# Altium PCB pulsegen-v2-released.PcbDoc
Units mm, origin at the board's own origin, x right, y up, seen from the top; angles counter-clockwise.
Board outline 66.14 x 42.58 mm, 2 copper layers (Top Layer, Bottom Layer), stack 1.646 mm thick; 26 components, 13 nets, 68 pads, 168 vias.
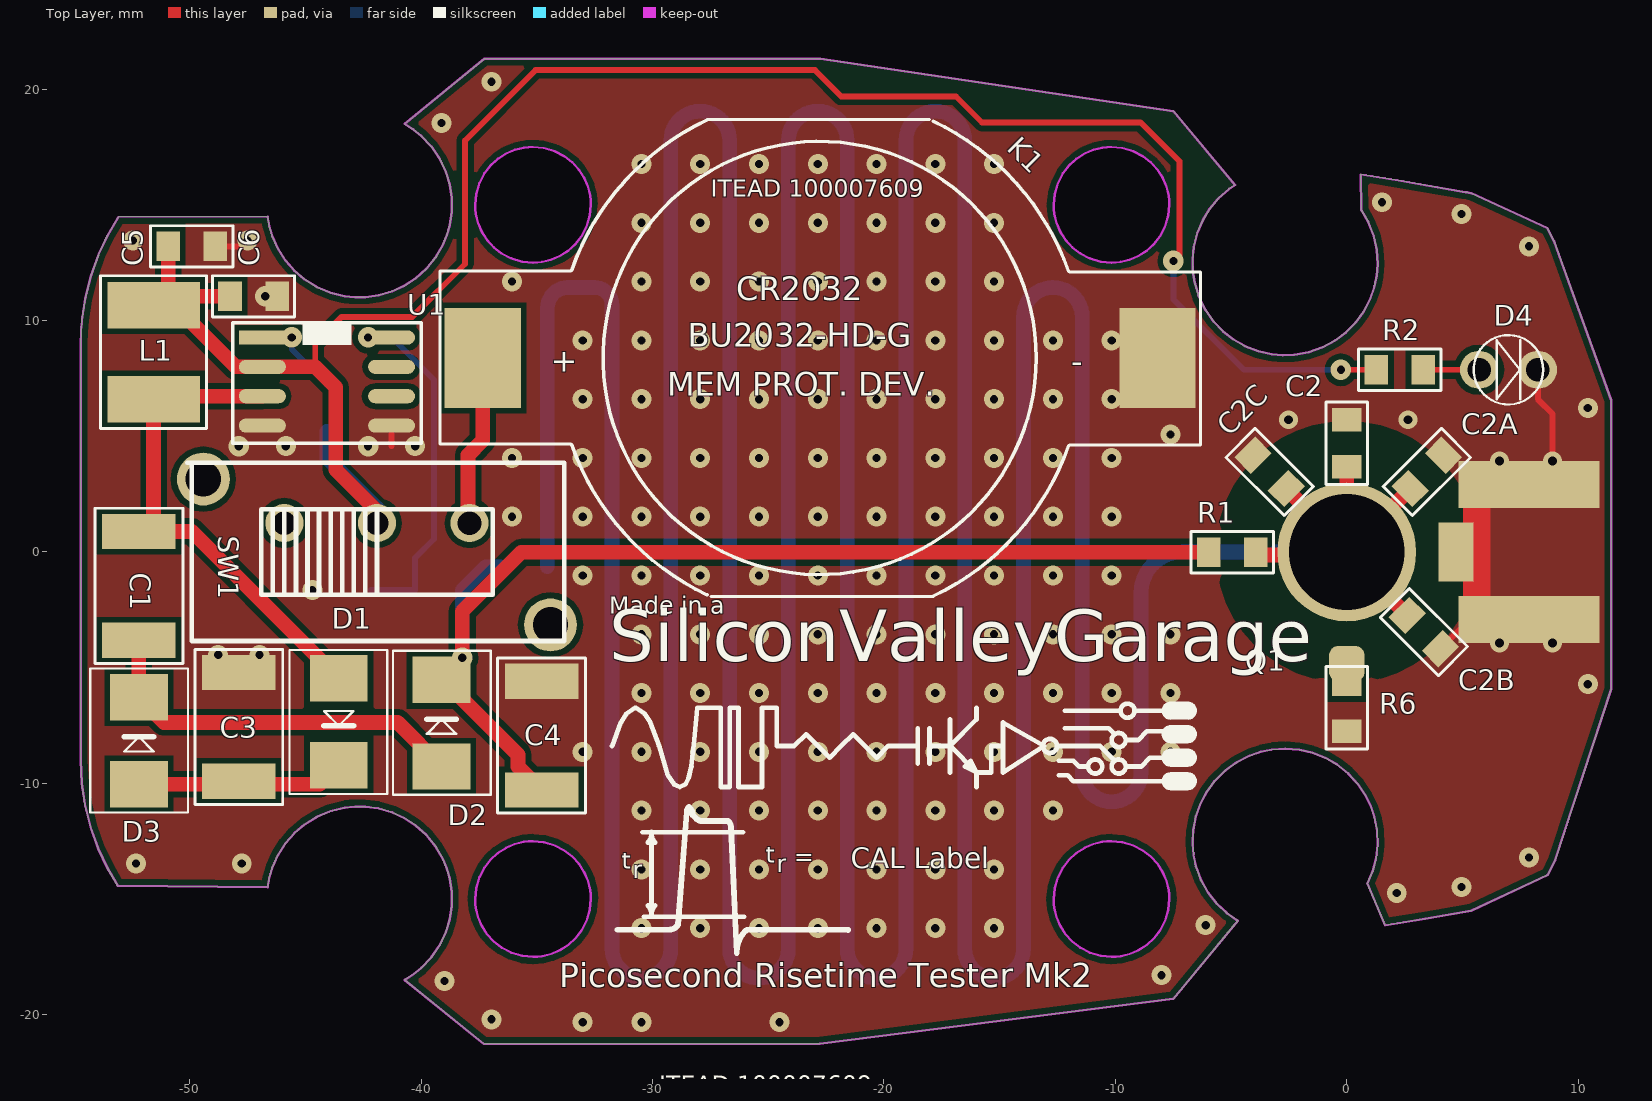
[diagram p0: Top Layer view]
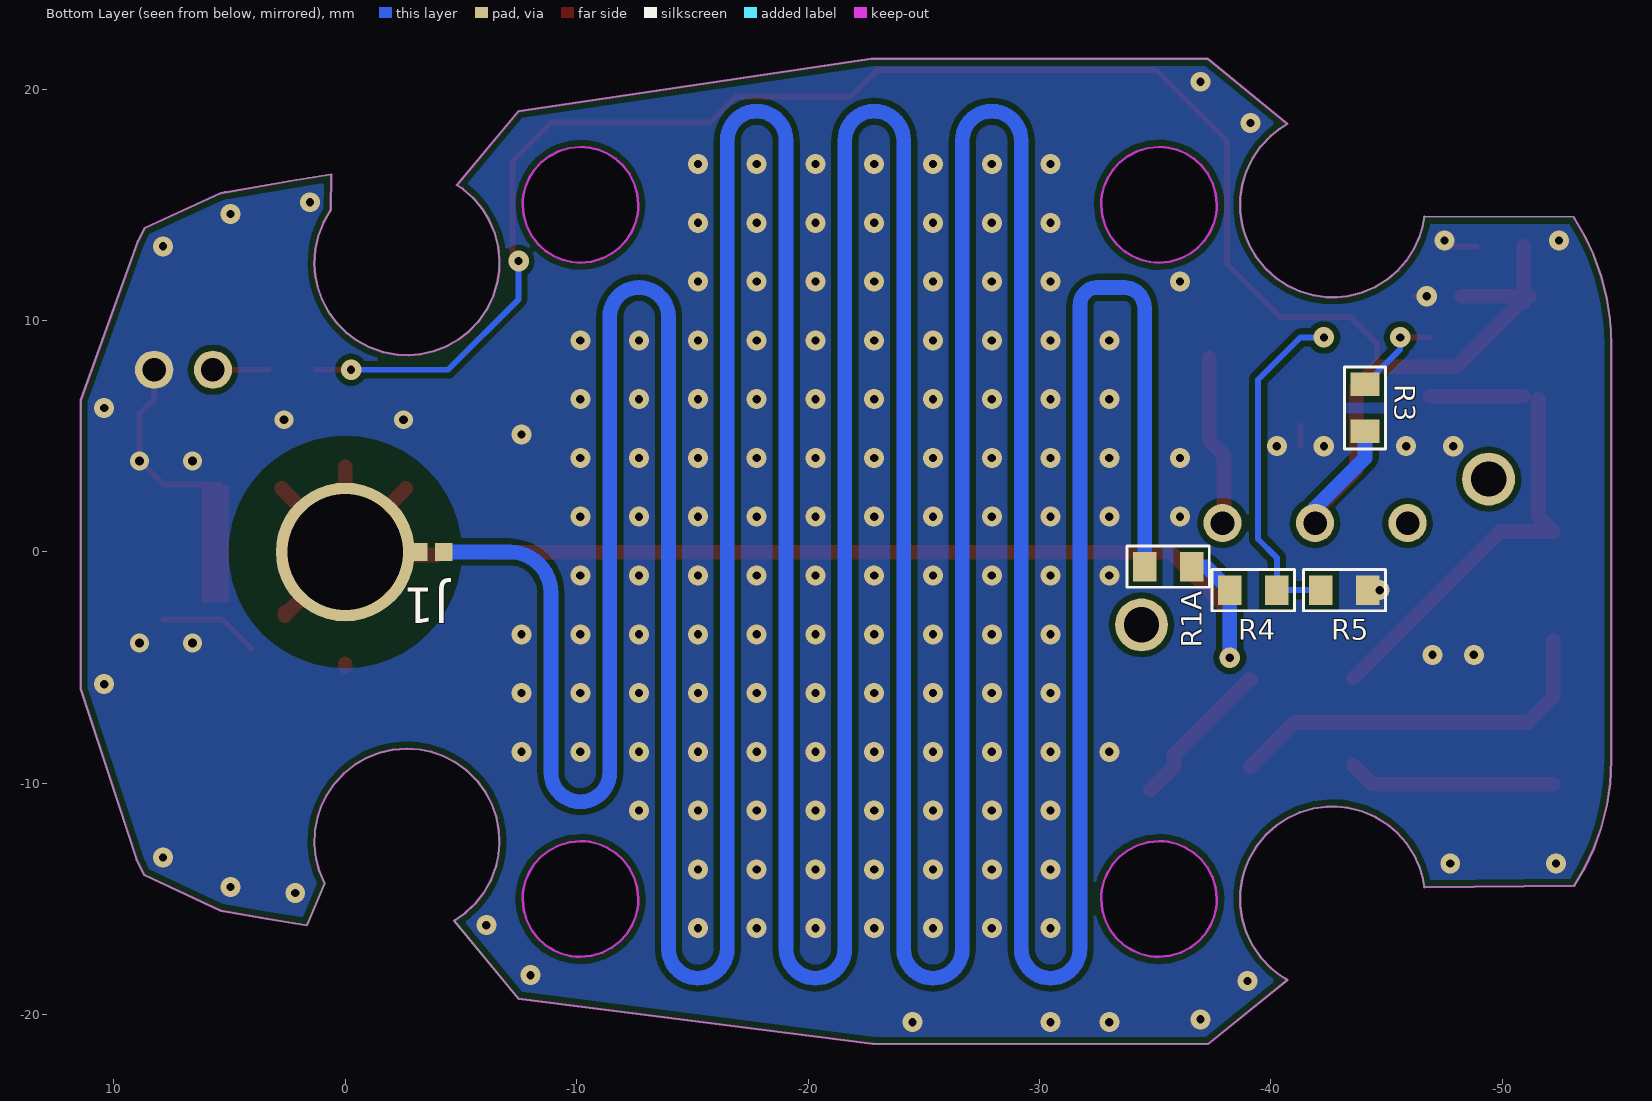
[diagram p1: Bottom Layer view, seen from below]

## Layer stack, top to bottom
Top Layer: signal copper 0.0356
Dielectric: core 1.5748, FR-4, Dk 4.8
Bottom Layer: signal copper 0.0356

## Board outline
-40.716,-18.489 -40.348,-18.255 -39.996,-17.974 -39.563,-17.519 -39.204,-16.998 -38.93,-16.422 -38.764,-15.871 -38.679,-15.297 -38.679,-14.689 -38.767,-14.109 -38.887,-13.69 -39.058,-13.273 -39.372,-12.729 -39.771,-12.238 -40.246,-11.813 -40.729,-11.498 -41.255,-11.255 -41.839,-11.084 -42.42,-11.004 -42.856,-11.001 -43.303,-11.048 -43.915,-11.196 -44.498,-11.44 -45.04,-11.776 -45.478,-12.15 -45.86,-12.586 -46.188,-13.099 -46.428,-13.634 -46.554,-14.051 -46.636,-14.494 -53.107,-14.426 -53.564,-13.645 -53.949,-12.825 -54.287,-11.878 -54.528,-10.904 -54.66,-10.004 -54.711,-8.998 -54.711,9.005 -54.697,9.517 -54.657,10.029 -54.522,10.93 -54.278,11.911 -53.941,12.852 -53.556,13.667 -53.097,14.448 -53.075,14.478 -46.636,14.5 -46.554,14.058 -46.428,13.64 -46.188,13.105 -45.86,12.593 -45.478,12.157 -45.04,11.783 -44.498,11.447 -43.915,11.203 -43.304,11.054 -42.856,11.008 -42.42,11.011 -41.839,11.09 -41.255,11.261 -40.729,11.504 -40.246,11.819 -39.771,12.244 -39.373,12.735 -39.058,13.28 -38.887,13.696 -38.767,14.115 -38.679,14.695 -38.679,15.304 -38.764,15.877 -38.93,16.429 -39.204,17.004 -39.563,17.525 -39.996,17.981 -40.347,18.262 -40.716,18.495 -37.262,21.316 -22.741,21.31 -7.493,19.05 -4.826,15.856 -5.085,15.69 -5.559,15.267 -5.925,14.824 -6.226,14.33 -6.453,13.795 -6.606,13.2 -6.666,12.614 -6.65,12.134 -6.573,11.641 -6.39,11.041 -6.114,10.473 -5.749,9.953 -5.352,9.538 -4.896,9.182 -4.391,8.894 -3.817,8.672 -3.243,8.545 -2.764,8.504 -2.265,8.524 -1.648,8.635 -1.052,8.844 -0.493,9.146 -0.034,9.492 0.372,9.903 0.717,10.371 1.004,10.915 1.197,11.471 1.293,11.942 1.332,12.439 1.293,13.066 1.155,13.682 0.92,14.272 0.63,14.768 0.606,16.315 2.349,16.032 5.133,15.551 5.201,15.539 5.27,15.526 5.379,15.507 8.666,13.999 8.959,13.426 11.43,6.556 11.43,-5.916 9.002,-13.319 8.689,-13.953 5.379,-15.5 5.311,-15.512 5.243,-15.525 5.133,-15.544 3.395,-15.849 1.653,-16.14 0.892,-14.322 1.117,-13.792 1.264,-13.233 1.329,-12.656 1.307,-12.041 1.197,-11.463 1.045,-11.007 0.83,-10.556 0.484,-10.033 0.057,-9.568 -0.441,-9.174 -0.94,-8.889 -1.478,-8.678 -2.044,-8.546 -2.658,-8.497 -3.244,-8.539 -3.715,-8.636 -4.188,-8.797 -4.747,-9.08 -5.259,-9.45 -5.709,-9.899 -6.05,-10.361 -6.322,-10.871 -6.519,-11.418 -6.639,-12.022 -6.666,-12.609 -6.624,-13.088 -6.519,-13.576 -6.303,-14.165 -5.995,-14.716 -5.602,-15.215 -5.182,-15.608 -4.707,-15.938 -7.493,-19.304 -22.772,-21.248 -37.287,-21.26
cut-out: -10.167,-17.497 -9.973,-17.489 -9.774,-17.466 -9.387,-17.372 -9.006,-17.211 -8.648,-16.982 -8.331,-16.693 -8.068,-16.355 -7.853,-15.941 -7.711,-15.464 -7.667,-14.997 -7.675,-14.802 -7.699,-14.604 -7.792,-14.216 -7.954,-13.835 -8.182,-13.477 -8.471,-13.16 -8.81,-12.898 -9.223,-12.682 -9.7,-12.541 -10.167,-12.497 -10.362,-12.504 -10.561,-12.528 -10.948,-12.622 -11.329,-12.783 -11.687,-13.011 -12.004,-13.301 -12.266,-13.639 -12.482,-14.052 -12.623,-14.53 -12.667,-14.997 -12.66,-15.191 -12.636,-15.39 -12.543,-15.777 -12.381,-16.158 -12.153,-16.516 -11.863,-16.833 -11.525,-17.096 -11.112,-17.311 -10.635,-17.453
cut-out: -35.167,-17.497 -34.973,-17.489 -34.774,-17.466 -34.387,-17.372 -34.006,-17.211 -33.648,-16.982 -33.331,-16.693 -33.068,-16.355 -32.853,-15.941 -32.711,-15.464 -32.667,-14.997 -32.675,-14.802 -32.699,-14.604 -32.792,-14.216 -32.954,-13.835 -33.182,-13.477 -33.471,-13.16 -33.81,-12.898 -34.223,-12.682 -34.7,-12.541 -35.167,-12.497 -35.362,-12.504 -35.561,-12.528 -35.948,-12.622 -36.329,-12.783 -36.687,-13.011 -37.004,-13.301 -37.266,-13.639 -37.482,-14.052 -37.623,-14.53 -37.667,-14.997 -37.66,-15.191 -37.636,-15.39 -37.543,-15.777 -37.381,-16.158 -37.153,-16.516 -36.863,-16.833 -36.525,-17.096 -36.112,-17.311 -35.635,-17.453
cut-out: -35.167,12.503 -34.973,12.511 -34.774,12.534 -34.387,12.628 -34.006,12.789 -33.648,13.018 -33.331,13.307 -33.068,13.645 -32.853,14.059 -32.711,14.536 -32.667,15.003 -32.675,15.198 -32.699,15.396 -32.792,15.784 -32.954,16.165 -33.182,16.523 -33.471,16.84 -33.81,17.102 -34.223,17.318 -34.7,17.459 -35.167,17.503 -35.362,17.496 -35.561,17.472 -35.948,17.378 -36.329,17.217 -36.687,16.989 -37.004,16.699 -37.266,16.361 -37.482,15.948 -37.623,15.47 -37.667,15.003 -37.66,14.809 -37.636,14.61 -37.543,14.223 -37.381,13.842 -37.153,13.484 -36.863,13.167 -36.525,12.904 -36.112,12.689 -35.635,12.547
cut-out: -10.167,12.503 -9.973,12.511 -9.774,12.534 -9.387,12.628 -9.006,12.789 -8.648,13.018 -8.331,13.307 -8.068,13.645 -7.853,14.059 -7.711,14.536 -7.667,15.003 -7.675,15.198 -7.699,15.396 -7.792,15.784 -7.954,16.165 -8.182,16.523 -8.471,16.84 -8.81,17.102 -9.223,17.318 -9.7,17.459 -10.167,17.503 -10.362,17.496 -10.561,17.472 -10.948,17.378 -11.329,17.217 -11.687,16.989 -12.004,16.699 -12.266,16.361 -12.482,15.948 -12.623,15.47 -12.667,15.003 -12.66,14.809 -12.636,14.61 -12.543,14.223 -12.381,13.842 -12.153,13.484 -11.863,13.167 -11.525,12.904 -11.112,12.689 -10.635,12.547

## Design rules (kind name [scope] priority, off if disabled: settings)
AssemblyTestPointUsage [All] p1 off:
AssemblyTestpoint [All] p1 off: testpointundercomponent=TRUE minsize=1.016 maxsize=2.54 preferedsize=1.524 minholesize=0 maxholesize=1.016 preferedholesize=0.813 testpointgrid=0.025 usegrid=TRUE gridtolerance=0 allowsidetop=TRUE allowsidebottom=TRUE
Clearance Clearance_2 [All] p1: gap=0.254
Clearance Clearance_1 [InPolygon] p2: gap=0.203
Clearance waveguide [InNet('NetC1_1') vs InNet('GND')] p3: gap=0.203
ComponentClearance [All] p1 off: gap=0.254 collisioncheckmode=3 verticalgap=0.254 showdistances=FALSE
DiffPairsRouting [All] p1 off: maxlimit=0.254 minlimit=0.254 mostfreqgap=0.254 maxuncoupledlength=12.7
FabricationTestPointUsage [All] p1 off: valid=0 allowmultiple=FALSE
FabricationTestpoint [All] p1 off: side=3 testpointundercomponent=TRUE minsize=1.016 maxsize=2.54 preferedsize=1.524 minholesize=0 maxholesize=1.016 preferedholesize=0.813 testpointgrid=0.025 allowsidetop=TRUE allowsidebottom=TRUE usegrid=TRUE gridtolerance=0
FanoutControl Fanout_BGA [IsBGA] p1 off: bgadir=Out bgaviamode=Centered fanoutstyle=Auto fanoutdirection=Alternating viagrid=0.025 // Fanout_BGA (Default Rule)
FanoutControl Fanout_LCC [IsLCC] p2 off: bgadir=Out bgaviamode=Centered fanoutstyle=Auto fanoutdirection=Alternating viagrid=0.025 // Fanout_LCC (Default Rule)
FanoutControl Fanout_SOIC [IsSOIC] p3 off: bgadir=Out bgaviamode=Centered fanoutstyle=Auto fanoutdirection=Alternating viagrid=0.025 // Fanout_SOIC (Default Rule)
FanoutControl Fanout_Small [(CompPinCount < 5)] p4 off: bgadir=Out bgaviamode=Centered fanoutstyle=Auto fanoutdirection=OutThenIn viagrid=0.025 // Fanout_Small (Default Rule)
FanoutControl Fanout_Default [All] p5 off: bgadir=Out bgaviamode=Centered fanoutstyle=Auto fanoutdirection=Alternating viagrid=0.025 // Fanout_Default (Default Rule)
Height [All] p1 off: minheight=0 maxheight=25.4 prefheight=12.7
HoleSize [All] p1 off: absolutevalues=TRUE maxlimit=2.54 minlimit=0.025 maxpercent=80.000 minpercent=20.000
HoleToHoleClearance [All] p1 off: gap=0.254 allowstackedmicrovias=TRUE
LayerPairs [All] p1 off: enforce=TRUE
MinimumSolderMaskSliver [All] p1 off: minsoldermaskwidth=0.254
NetAntennae [All] p1 off: netantennaetolerance=0
PasteMaskExpansion [All] p1 off: expansion=0
PlaneClearance [All] p1 off: clearance=0.508
PlaneConnect [All] p1 off: planeconnectstyle=Relief reliefexpansion=0.508 reliefentries=4 reliefconductorwidth=0.254 reliefairgap=0.254
PolygonConnect [All] p1: connectstyle=Direct reliefconductorwidth=0.254 reliefentries=4 polygonreliefangle="90 Angle" airgapwidth=0.254
RoutingCorners [All] p1 off: cornerstyle=45-Degree minsetback=2.54 maxsetback=2.54
RoutingLayers [All] p1 off: top layer_v5=TRUE bottom layer_v5=TRUE
RoutingPriority [All] p1 off: routingpriority=0
RoutingTopology [All] p1 off: topology=Shortest
RoutingVias [All] p1: holewidth=0.356 width=0.889 viastyle="Through Hole" minholewidth=0.356 minwidth=0.889 maxholewidth=0.711 maxwidth=1.27
SilkToSilkClearance [All] p1 off: silktosilkclearance=0.254
SilkscreenOverComponentPads [All] p1 off: minsilkscreentomaskgap=0.254
SolderMaskExpansion [All] p1 off: expansion=0.102
Width [All] p1: maxlimit=2.54 minlimit=0.254 preferedwidth=0.254 minimp=50.000000 maximp=50.000000 favimp=50.000000
2 further rules are at their usual default settings.

## Components (designator, comment, footprint, x,y, rotation, side; value= is the part's Value field where it differs from the comment)
C1 "470nF" 1812C-GENERIC -52.197,0.889 r270 top
C2 "2pF" 0805C-GENERIC 0,3.937 r90 top
C2A "2pF" 0805C-GENERIC 2.921,2.921 r45 top
C2B "2pF" 0805C-GENERIC 2.794,-2.921 r315 top
C2C "2pF" 0805C-GENERIC -2.794,2.921 r135 top
C3 "470nF" 1812C-GENERIC -47.879,-5.207 r270 top
C4 "470nF" 1812C-GENERIC -34.798,-5.588 r270 top
C5 "10uF" 0805C-GENERIC -50.673,13.208 r0 top
C6 "10uF" 0805C-GENERIC -48.006,11.049 r0 top
D1 "MURS120" DIODE-SMB -43.561,-5.461 r90 top
D2 "MURS120" DIODE-SMB -39.116,-9.271 r270 top
D3 "MURS120" DIODE-SMB -52.197,-10.033 r270 top
D4 "LED-YELLOW-3MM" LED-3MM-YELLOW 5.715,7.874 r0 top
J1 "BYPASS" BYPASS -4.645,0 r0 bottom
K1 "3V-CR2023" BATCLIP-CR2032 -37.338,8.382 r0 top
L1 "150uH" TOKO-NR4018 -51.562,10.668 r270 top
Q1 "2N2369-JW" JW2N2369 1.778,-0.889 r0 top
R1 "10M" 0805R-TBD -5.709,-0.013 r0 top
R1A "10M" 0805R-TBD -36.322,-0.635 r0 bottom
R2 "220R" 0805R-220 1.524,7.874 r0 top
R3 "220R" 0805R-220 -44.069,5.461 r90 bottom
R4 "10M" 0805R-TBD -38.481,-1.651 r180 bottom
R5 "10K" 0805R-10K -42.164,-1.651 r180 bottom
R6 "10K" 0805R-10K 0,-5.715 r270 top
SW1 "SW-MHS122K" MHS122K -41.91,0 r180 top
U1 "LT1073" SO8 -46.863,9.271 r0 top

## Footprints (in the part's own frame and the unit in brackets; to place one, negate y for a bottom-side part, rotate by r counter-clockwise, add the part's x,y. Pads: shape width x height; smd on the part's side, far side on the other; paste and mask are expansions set on the pad)
0805C-GENERIC [mil] "CAPACITOR 0805"
  rect 40x50 smd: 1(-10,0) 2(70,0)
  silkscreen extent -40,-35 100,35, body extent -11,-25 70,25, height 26
0805R-10K [mil] "RESISTOR 0805"
  rect 40x50 smd: 1(0,0) 2(80,0)
  silkscreen extent -30,-35 110,35, body extent -1,-25 80,25, height 27
0805R-220 [mil] "RESISTOR 0805"
  rect 40x50 smd: 1(-10,0) 2(70,0)
  silkscreen extent -40,-35 100,35, body extent -11,-25 70,25, height 27
0805R-TBD [mil] "RESISTOR 0805 VALUE TO BE DETERMINED"
  rect 40x50 smd: 1(-10,0) 2(70,0)
  silkscreen extent -40,-35 100,35, body extent -11,-25 70,25, height 27
1812C-GENERIC [mil]
  rect 60x125 smd: 1(0,0) 2(185,0)
  silkscreen extent -39,-75 224,75, body extent 2,-63 179,63, height 63
BATCLIP-CR2032 [mil] "BATTERY CLIP 2032 SMD BU2032SM-HD-G"
  rect 130x170 smd mask+2: +(0,0) -(1148,0)
  silkscreen extent -73,-406 1221,406, body extent -56,-393 1204,397, height 209
BYPASS [mil] "SOLDERDOT BYPASS"
  rect 30x30 smd paste-300: 1(15,0)
  rect 30x30 smd paste-30: 2(57.86,0)
DIODE-SMB [mm]
  rect 2x2.5 smd: A(0,0) K(-3.75,0)
  silkscreen extent -5,-2.1 1.22,2.12, body extent -4.57,-1.95 0.8,2, height 2.23
JW2N2369 [mil]
  rrect50% 60x60 smd mask+2: B(-70,-155)
  round 236.22 hole 196.85 mask+2: C(-70,35)
  rect 60x100 smd mask+2: G(116,35)
  body extent -218,-165 215,209, height 140
LED-3MM-YELLOW [mil]
  round 65 hole 40: A(0,0) K(100,0)
  silkscreen extent -9,-59 109,59, body extent -15,-63 114,67, height 250
MHS122K [mil]
  round 65 hole 40: C(0,-49.21) NC(157.48,-49.21) NO(-157.48,-49.21)
  round 90 hole 60: M1(295.28,-124.02) M2(-295.28,124.02)
  silkscreen extent -319,-152 323,152, body extent -323,-132 323,134, height 430
SO8 [mil]
  rect 80x24 smd: 1(0,0)
  oval 80x24 smd: 2(0,-50) 3(0,-100) 4(0,-150) 5(220,-150) 6(220,-100) 7(220,-50) 8(220,0)
  silkscreen extent -50,-180 270,25, body extent -18,-170 242,22, height 61
TOKO-NR4018 [mm] "TOKO INDUCTOR NR4018 SERIES"
  rect 2x4 smd mask+0.051: 1(0,0) 2(4.064,0)
  silkscreen extent -1.27,-2.29 5.33,2.29, body extent 0,-2.03 4.06,2.03, height 1.8

## Part data
C1 C3 C4: library part 1812C-470nF-250V-X7R-MUR, "CAPACITOR 1812 CERAMIC"
C2 C2A C2B C2C C5 C6: library part 0805C-10UF-6V3-X5R-PAN, "CAPACITOR 0805 CERAMIC"
D1 D2 D3: "DIODE"
J1: "SOLDERDOT BYPASS"
K1: library part BATCLIP-CR2032-SMD, "BU2032SM-HD-G"
L1: library part 150U-NR4018-TOKO
R1 R1A R4: library part 0805R-10M, "RESISTOR 0805 VALUE TO BE DETERMINED"
R2 R3: library part 0805R-220R, "RESISTOR 0805 1/4 WATT THIN FILM"
R5 R6: library part 0805R-10K, "RESISTOR 0805 1/4 WATT THIN FILM"
SW1: "SWITCH DPDT"

## Free pads (board coordinates)
  round 5 on Mech1 mask+0.051: 0(-35.179,-15.011) 1(-10.16,-14.986) 2(-10.16,15.011) 3(-35.179,15.011)
  rect 6.096x2.032 smd mask+0.051: 2(7.874,-2.921) 2(7.874,2.921)

## Via types
v1: diameter 0.864, hole 0.356, Top Layer to Bottom Layer, 154 vias
v2: diameter 0.889, hole 0.356, Top Layer to Bottom Layer, 8 vias
v3: diameter 0.813, hole 0.381, Top Layer to Bottom Layer, 6 vias

## Nets (pads, with @x,y where several pads share a name; then routed paths per layer and width w, separated by ;. In a path a pad name is that pad's centre, name@x,y a point inside that pad or via, vN(x,y) a via of type N, cw(c..) or ccw(c..) an arc to the next point about the centre after c; other vN are vias at no path point)
GND: C2.2 C2A.2 C2B.2 C2C.2 C3.1 C4.1 C5.2 C6.2 D4.K K1.- pad.2@7.874,2.921 pad.2@7.874,-2.921 Q1.G R5.2 R6.2 U1.4 U1.5 | length 15.3
  Top Layer w0.254: C5.2 -47.752,13.208 v1(-47.498,13.462) ; v2(-46.736,11.049) C6.2 ; -41.275,4.572 U1.5 ; C2B.2 5.308,-2.921 pad.2@7.874,-2.921 ; pad.2@5.435,2.921 7.874,2.921 v3(8.89,3.937) 8.89,5.969 8.255,6.604 D4.K
  other v1: -33.02,-20.32 -30.48,-20.32 -24.511,-20.32 -36.957,-20.193 -38.989,-18.542 -8.001,-18.288 -30.48,-16.256 -27.94,-16.256 -25.4,-16.256 -22.86,-16.256 -20.32,-16.256 -17.78,-16.256 -15.24,-16.256 -6.096,-16.129 2.159,-14.732 4.953,-14.478 -30.48,-13.716 -27.94,-13.716 -25.4,-13.716 -22.86,-13.716 -20.32,-13.716 -17.78,-13.716 -15.24,-13.716 -52.324,-13.462 -47.752,-13.462 7.874,-13.208 -30.48,-11.176 -27.94,-11.176 -25.4,-11.176 -22.86,-11.176 -20.32,-11.176 -17.78,-11.176 -15.24,-11.176 -12.7,-11.176 -33.017,-8.636 -30.48,-8.636 -27.94,-8.636 -25.4,-8.636 -22.86,-8.636 -20.32,-8.636 -17.78,-8.636 -15.24,-8.636 -12.7,-8.636 -10.16,-8.636 -7.62,-8.636 -30.48,-6.096 -27.94,-6.096 -25.4,-6.096 -22.86,-6.096 -20.32,-6.096 -17.78,-6.096 -15.24,-6.096 -12.7,-6.096 -10.16,-6.096 -7.62,-6.096 10.414,-5.715 -48.768,-4.445 -46.99,-4.445 -30.48,-3.556 -27.94,-3.556 -25.4,-3.556 -22.86,-3.556 -20.32,-3.556 -17.78,-3.556 -15.24,-3.556 -12.7,-3.556 -10.16,-3.556 -7.62,-3.556 -44.704,-1.651 -33.017,-1.016 -30.48,-1.016 -27.94,-1.016 -25.4,-1.016 -22.86,-1.016 -20.32,-1.016 -17.78,-1.016 -15.24,-1.016 -12.7,-1.016 -10.16,-1.016 -36.068,1.524 -33.017,1.524 -30.48,1.524 -27.94,1.524 -25.4,1.524 -22.86,1.524 -20.32,1.524 -17.78,1.524 -15.24,1.524 -12.7,1.524 -10.16,1.524 -36.068,4.064 -33.017,4.064 -30.48,4.064 -27.94,4.064 -25.4,4.064 -22.86,4.064 -20.32,4.064 -17.78,4.064 -15.24,4.064 -12.7,4.064 -10.16,4.064 -45.847,4.572 -40.259,4.572 -7.62,5.08 10.414,6.223 -33.017,6.604 -30.48,6.604 -27.94,6.604 -25.4,6.604 -22.86,6.604 -20.32,6.604 -17.78,6.604 -15.24,6.604 -12.7,6.604 -10.16,6.604 -33.017,9.144 -30.48,9.144 -27.94,9.144 -25.4,9.144 -22.86,9.144 -20.32,9.144 -17.78,9.144 -15.24,9.144 -12.7,9.144 -10.16,9.144 -36.068,11.684 -30.48,11.684 -27.94,11.684 -25.4,11.684 -22.86,11.684 -20.32,11.684 -17.78,11.684 -15.24,11.684 7.874,13.208 -52.451,13.462 -30.48,14.224 -27.94,14.224 -25.4,14.224 -22.86,14.224 -20.32,14.224 -17.78,14.224 -15.24,14.224 4.953,14.605 1.524,15.113 -30.48,16.764 -27.94,16.764 -25.4,16.764 -22.86,16.764 -20.32,16.764 -17.78,16.764 -15.24,16.764 -39.116,18.542 -36.957,20.32
  other v2: -47.879,4.572 -42.291,4.572
  other v3: 6.604,-3.937 8.89,-3.937 6.604,3.937 -2.514,5.715 2.641,5.715
NetC1_1: C1.1 D1.A L1.2 U1.3 | length 21.3
  Top Layer w0.635: L1.2 -51.562,1.524 C1.1 -49.911,0.889 D1.A ; L1.2@-50.927,6.731 U1.3
NetC1_2: C1.2 D2.A D3.K | length 16.8
  Top Layer w0.635: C1.2 D3.K -51.114,-7.366 -41.021,-7.366 D2.A
NetC2_1: C2.1 C2A.1 C2B.1 C2C.1 J1.2 Q1.C R1.2 | length 22.1
  Top Layer w0.635: R1.2@-3.931,-0.127 0,-0.127 C2B.1 C2B.1@2.614,-2.614 ; C2C.1 Q1.C@0,0.127 ; C2.1 Q1.C@0,0.127 ; C2A.1 Q1.C Q1.C@0,0.127
  Bottom Layer w0.635: J1.2@-3.06,0 Q1.C
NetC3_2: C3.2 D1.K D3.A | length 9
  Top Layer w0.635: D3.A -44.383,-10.033 D1.K
NetC4_2: C4.2 D2.K R1.1 R1A.1 R4.1 | length 46.8
  Top Layer w0.635: D2.K -39.056,-5.521 -35.814,-8.763 -35.814,-9.271 C4.2 ; v2(-38.227,-4.572) -38.227,-2.564 -35.676,-0.013 R1.1@-6.3,-0.013
  Bottom Layer w0.635: v2(-38.227,-4.572) -38.1,-4.572 -38.227,-4.445 R4.1 -37.211,-0.635 R1A.1
NetD4_A: D4.A R2.2 | length 2.4
  Top Layer w0.254: R2.2 D4.A
NetK1_+: K1.+ SW1.NO | length 7.4
  Top Layer w0.635: SW1.NO -37.973,1.313 -37.973,4.191 -37.338,4.826 K1.+
NetQ1_B: Q1.B R6.1 | length 0.1
  Top Layer w0.635: Q1.B@0,-4.953 Q1.B
NetR3_2: R3.2 U1.1 | length 3.9
  Top Layer w0.254: U1.1 v2(-45.593,9.271)
  Bottom Layer w0.254: v2(-45.593,9.271) -45.593,8.763 R3.2
NetR4_2: R4.2 R5.1 U1.8 | length 14.9
  Bottom Layer w0.254: v2(-42.291,9.271) -41.275,9.271 -39.446,7.442 -39.446,0.559 -40.259,-0.254 R4.2 R5.1
V3: C5.1 C6.1 L1.1 R2.1 R3.1 SW1.C U1.2 | length 89.3
  Top Layer w0.254: -44.577,8.001 -44.577,9.017 -43.434,10.16 -40.386,10.16 -38.104,12.442 -38.104,17.776 -35.052,20.828 -22.987,20.828 -21.844,19.685 -16.891,19.685 -15.764,18.558 -8.906,18.558 -7.231,16.883 -7.231,12.835 v2(-7.493,12.573) ; v2(-0.254,7.874) R2.1
  Top Layer w0.635: L1.1@-51.181,11.049 L1.1@-50.927,11.049 ; L1.1@-50.927,10.795 L1.1@-50.927,11.049 ; C5.1 L1.1@-50.927,11.049 ; L1.1@-50.673,10.668 -48.006,8.001 U1.2 -44.577,8.001 -43.696,7.12 -43.696,3.563 -41.91,1.778 SW1.C ; C6.1 L1.1@-50.927,11.049
  Bottom Layer w0.254: v2(-7.493,12.573) -7.493,10.922 -4.445,7.874 v2(-0.254,7.874)
  Bottom Layer w0.635: R3.1 -44.069,4.064 -41.91,1.905 SW1.C
WAVEGUIDE: J1.1 R1A.2 | length 696.8
  Bottom Layer w0.635: -34.544,10.541 cw(c-33.655,10.541) -33.655,11.43 ; -34.544,10.541 cw(c-33.655,10.541) -33.655,11.43 ; -34.544,10.541 R1A.2 -34.544,10.541 ; -33.655,11.43 -32.512,11.43 ; -33.655,11.43 -32.512,11.43 ; -32.512,11.43 cw(c-32.512,10.668) -31.75,10.668 ; -32.512,11.43 cw(c-32.512,10.668) -31.75,10.668 ; -31.75,-17.145 ccw(c-30.48,-17.145) -30.48,-18.415 ; -31.75,-17.145 ccw(c-30.48,-17.145) -30.48,-18.415 ; -31.75,-17.145 -31.75,10.668 ; -31.75,-17.145 -31.75,10.668 ; -30.48,-18.415 ccw(c-30.48,-17.145) -29.21,-17.145 ; -30.48,-18.415 ccw(c-30.48,-17.145) -29.21,-17.145 ; -29.21,-17.145 -29.21,17.78 ; -29.21,-17.145 -29.21,17.78 ; -29.21,17.78 cw(c-27.94,17.78) -27.94,19.05 ; -29.21,17.78 cw(c-27.94,17.78) -27.94,19.05 ; -27.94,19.05 cw(c-27.94,17.78) -26.67,17.78 ; -27.94,19.05 cw(c-27.94,17.78) -26.67,17.78 ; -26.67,-17.145 ccw(c-25.4,-17.145) -25.4,-18.415 ; -26.67,-17.145 ccw(c-25.4,-17.145) -25.4,-18.415 ; -26.67,-17.145 -26.67,17.78 ; -26.67,-17.145 -26.67,17.78 ; -25.4,-18.415 ccw(c-25.4,-17.145) -24.13,-17.145 ; -25.4,-18.415 ccw(c-25.4,-17.145) -24.13,-17.145 ; -24.13,-17.145 -24.13,17.78 ; -24.13,-17.145 -24.13,17.78 ; -24.13,17.78 cw(c-22.86,17.78) -22.86,19.05 ; -24.13,17.78 cw(c-22.86,17.78) -22.86,19.05 ; -22.86,19.05 cw(c-22.86,17.78) -21.59,17.78 ; -22.86,19.05 cw(c-22.86,17.78) -21.59,17.78 ; -21.59,-17.145 ccw(c-20.32,-17.145) -20.32,-18.415 ; -21.59,-17.145 ccw(c-20.32,-17.145) -20.32,-18.415 ; -21.59,-17.145 -21.59,17.78 ; -21.59,-17.145 -21.59,17.78 ; -20.32,-18.415 ccw(c-20.32,-17.145) -19.05,-17.145 ; -20.32,-18.415 ccw(c-20.32,-17.145) -19.05,-17.145 ; -19.05,-17.145 -19.05,17.78 ; -19.05,-17.145 -19.05,17.78 ; -19.05,17.78 cw(c-17.78,17.78) -17.78,19.05 ; -19.05,17.78 cw(c-17.78,17.78) -17.78,19.05 ; -17.78,19.05 cw(c-17.78,17.78) -16.51,17.78 ; -17.78,19.05 cw(c-17.78,17.78) -16.51,17.78 ; -16.51,-17.145 ccw(c-15.24,-17.145) -15.24,-18.415 ; -16.51,-17.145 ccw(c-15.24,-17.145) -15.24,-18.415 ; -16.51,-17.145 -16.51,17.78 ; -16.51,-17.145 -16.51,17.78 ; -15.24,-18.415 ccw(c-15.24,-17.145) -13.97,-17.145 ; -15.24,-18.415 ccw(c-15.24,-17.145) -13.97,-17.145 ; -13.97,-17.145 -13.97,10.16 ; -13.97,-17.145 -13.97,10.16 ; -13.97,10.16 cw(c-12.7,10.16) -12.7,11.43 ; -13.97,10.16 cw(c-12.7,10.16) -12.7,11.43 ; -12.7,11.43 cw(c-12.7,10.16) -11.43,10.16 ; -12.7,11.43 cw(c-12.7,10.16) -11.43,10.16 ; -11.43,-9.525 ccw(c-10.16,-9.525) -10.16,-10.795 ; -11.43,-9.525 ccw(c-10.16,-9.525) -10.16,-10.795 ; -11.43,-9.525 -11.43,10.16 ; -11.43,-9.525 -11.43,10.16 ; -10.16,-10.795 ccw(c-10.16,-9.525) -8.89,-9.525 ; -10.16,-10.795 ccw(c-10.16,-9.525) -8.89,-9.525 ; -8.89,-9.525 -8.89,-1.778 ; -8.89,-9.525 -8.89,-1.778 ; -8.89,-1.778 cw(c-7.112,-1.778) -7.112,0 ; -8.89,-1.778 cw(c-7.112,-1.778) -7.112,0 ; -7.112,0 -4.445,0 -7.112,0
pads on no net: SW1.M1 SW1.M2 SW1.NC U1.6 U1.7

## Polygon pours and split planes (outlines as drawn)
GND on Bottom Layer "TOP GND GND" (solid, remove dead copper, pour order 7): 12.509,21.65 -56.706,21.65 -56.706,-22.038 -56.452,-22.292 8.191,-22.292 12.763,-17.72
GND on Top Layer "gnd1" (solid, remove dead copper, pour order 5): -57.359,24.428 -57.359,-22.804 13.173,-22.804 12.954,0.127 5.588,0.127 5.159,1.395 4.499,2.822 3.302,3.937 2.143,4.855 0.972,5.246 0,5.461 -1.627,5.219 -3.054,4.573 -4.051,3.683 -4.886,2.472 -5.222,1.368 -5.454,-0.247 -4.985,-2.005 -4.051,-3.556 -2.143,-4.994 0,-5.461 1.988,-5.023 3.673,-4.042 5.015,-2.177 5.588,0.127 12.954,0.127 13.173,24.428

## Keep-outs
Keep-Out Layer:
  lines w0.102: -54.711,-8.998 -54.711,9.005 -54.697,9.517 -54.657,10.029 -54.522,10.93 -54.278,11.911 -53.941,12.852 -53.556,13.667 -53.097,14.448 -53.075,14.478 -46.636,14.5 -46.554,14.058 -46.428,13.64 -46.188,13.105 -45.86,12.593 -45.478,12.157 -45.04,11.783 -44.498,11.447 -43.915,11.203 -43.304,11.054 -42.856,11.008 -42.42,11.011 -41.839,11.09 -41.255,11.261 -40.729,11.504 -40.246,11.819 -39.771,12.244 -39.373,12.735 -39.058,13.28 -38.887,13.696 -38.767,14.115 -38.679,14.695 -38.679,15.304 -38.764,15.877 -38.93,16.429 -39.204,17.004 -39.563,17.525 -39.996,17.981 -40.347,18.262 -40.716,18.495 -37.262,21.316 -22.741,21.31 -7.493,19.05 -4.826,15.856 -5.085,15.69 -5.559,15.267 -5.925,14.824 -6.226,14.33 -6.453,13.795 -6.606,13.2 -6.666,12.614 -6.65,12.134 -6.573,11.641 -6.39,11.041 -6.114,10.473 -5.749,9.953 -5.352,9.538 -4.896,9.182 -4.391,8.894 -3.817,8.672 -3.243,8.545 -2.764,8.504 -2.265,8.524 -1.648,8.635 -1.052,8.844 -0.493,9.146 -0.034,9.492 0.372,9.903 0.717,10.371 1.004,10.915 1.197,11.471 1.293,11.942 1.332,12.439 1.293,13.066 1.155,13.682 0.92,14.272 0.63,14.768 0.606,16.315 2.349,16.032 5.133,15.551 5.201,15.539 5.27,15.526 5.379,15.507 8.666,13.999 8.959,13.426 11.43,6.556 11.43,-5.916 9.002,-13.319 8.689,-13.953 5.379,-15.5 5.311,-15.512 5.243,-15.525 5.133,-15.544 3.395,-15.849 1.653,-16.14 0.892,-14.322 1.117,-13.792 1.264,-13.233 1.329,-12.656 1.307,-12.041 1.197,-11.463 1.045,-11.007 0.83,-10.556 0.484,-10.033 0.057,-9.568 -0.441,-9.174 -0.94,-8.889 -1.478,-8.678 -2.044,-8.546 -2.658,-8.497 -3.244,-8.539 -3.715,-8.636 -4.188,-8.797 -4.747,-9.08 -5.259,-9.45 -5.709,-9.899 -6.05,-10.361 -6.322,-10.871 -6.519,-11.418 -6.639,-12.022 -6.666,-12.609 -6.624,-13.088 -6.519,-13.576 -6.303,-14.165 -5.995,-14.716 -5.602,-15.215 -5.182,-15.608 -4.707,-15.938 -7.493,-19.304 -22.772,-21.248 -37.287,-21.26 -40.716,-18.489 -40.348,-18.255 -39.996,-17.974 -39.563,-17.519 -39.204,-16.998 -38.93,-16.422 -38.764,-15.871 -38.679,-15.297 -38.679,-14.689 -38.767,-14.109 -38.887,-13.69 -39.058,-13.273 -39.372,-12.729 -39.771,-12.238 -40.246,-11.813 -40.729,-11.498 -41.255,-11.255 -41.839,-11.084 -42.42,-11.004 -42.856,-11.001 -43.303,-11.048 -43.915,-11.196 -44.498,-11.44 -45.04,-11.776 -45.478,-12.15 -45.86,-12.586 -46.188,-13.099 -46.428,-13.634 -46.554,-14.051 -46.636,-14.494 -53.107,-14.426 -53.564,-13.645 -53.949,-12.825 -54.287,-11.878 -54.528,-10.904 -54.66,-10.004 -54.711,-8.998 ; -37.667,-14.997 -37.66,-15.191 -37.636,-15.39 -37.543,-15.777 -37.381,-16.158 -37.153,-16.516 -36.863,-16.833 -36.525,-17.096 -36.112,-17.311 -35.635,-17.453 -35.167,-17.497 -34.973,-17.489 -34.774,-17.466 -34.387,-17.372 -34.006,-17.211 -33.648,-16.982 -33.331,-16.693 -33.068,-16.355 -32.853,-15.941 -32.711,-15.464 -32.667,-14.997 -32.675,-14.802 -32.699,-14.604 -32.792,-14.216 -32.954,-13.835 -33.182,-13.477 -33.471,-13.16 -33.81,-12.898 -34.223,-12.682 -34.7,-12.541 -35.167,-12.497 -35.362,-12.504 -35.561,-12.528 -35.948,-12.622 -36.329,-12.783 -36.687,-13.011 -37.004,-13.301 -37.266,-13.639 -37.482,-14.052 -37.623,-14.53 -37.667,-14.997 ; -37.667,15.003 -37.66,14.809 -37.636,14.61 -37.543,14.223 -37.381,13.842 -37.153,13.484 -36.863,13.167 -36.525,12.904 -36.112,12.689 -35.635,12.547 -35.167,12.503 -34.973,12.511 -34.774,12.534 -34.387,12.628 -34.006,12.789 -33.648,13.018 -33.331,13.307 -33.068,13.645 -32.853,14.059 -32.711,14.536 -32.667,15.003 -32.675,15.198 -32.699,15.396 -32.792,15.784 -32.954,16.165 -33.182,16.523 -33.471,16.84 -33.81,17.102 -34.223,17.318 -34.7,17.459 -35.167,17.503 -35.362,17.496 -35.561,17.472 -35.948,17.378 -36.329,17.217 -36.687,16.989 -37.004,16.699 -37.266,16.361 -37.482,15.948 -37.623,15.47 -37.667,15.003 ; -12.667,-14.997 -12.66,-15.191 -12.636,-15.39 -12.543,-15.777 -12.381,-16.158 -12.153,-16.516 -11.863,-16.833 -11.525,-17.096 -11.112,-17.311 -10.635,-17.453 -10.167,-17.497 -9.973,-17.489 -9.774,-17.466 -9.387,-17.372 -9.006,-17.211 -8.648,-16.982 -8.331,-16.693 -8.068,-16.355 -7.853,-15.941 -7.711,-15.464 -7.667,-14.997 -7.675,-14.802 -7.699,-14.604 -7.792,-14.216 -7.954,-13.835 -8.182,-13.477 -8.471,-13.16 -8.81,-12.898 -9.223,-12.682 -9.7,-12.541 -10.167,-12.497 -10.362,-12.504 -10.561,-12.528 -10.948,-12.622 -11.329,-12.783 -11.687,-13.011 -12.004,-13.301 -12.266,-13.639 -12.482,-14.052 -12.623,-14.53 -12.667,-14.997 ; -12.667,15.003 -12.66,14.809 -12.636,14.61 -12.543,14.223 -12.381,13.842 -12.153,13.484 -11.863,13.167 -11.525,12.904 -11.112,12.689 -10.635,12.547 -10.167,12.503 -9.973,12.511 -9.774,12.534 -9.387,12.628 -9.006,12.789 -8.648,13.018 -8.331,13.307 -8.068,13.645 -7.853,14.059 -7.711,14.536 -7.667,15.003 -7.675,15.198 -7.699,15.396 -7.792,15.784 -7.954,16.165 -8.182,16.523 -8.471,16.84 -8.81,17.102 -9.223,17.318 -9.7,17.459 -10.167,17.503 -10.362,17.496 -10.561,17.472 -10.948,17.378 -11.329,17.217 -11.687,16.989 -12.004,16.699 -12.266,16.361 -12.482,15.948 -12.623,15.47 -12.667,15.003
  text ".Layer_Name" at -137.496,-107.486 h2.03

## Other copper
Top Layer:
  rectangle net GND: 5.015,-2.177 6.212,2.895
  text ".Layer_Name" at -137.369,-94.278 h2.03
Bottom Layer:
  text ".Layer_Name" at -137.287,-96.647 h2.03

## Silkscreen, mask and mechanical layers (free items; w line width, h text height)
Top Overlay:
  drawing of 264 lines, arcs and shapes, not listed
  text "ITEAD 100007609" at -27.483,15.1 h1.27
  text "Made in a" at -31.877,-2.921 h1.27
  text "SiliconValleyGarage" at -31.877,-5.461 h3.81
  text "t" at -25.099,-13.666 h1.27
  text "=" at -23.867,-13.796 h1.27
  text "t" at -31.334,-13.929 h1.27
  text "CAL Label" at -21.427,-13.962 h1.52
  text "r" at -24.629,-14.074 h1.27
  text "r" at -30.864,-14.337 h1.27
  text "Picosecond Risetime Tester Mk2" at -34.041,-19.163 h1.78
  text "ITEAD 100007609" at -29.718,-23.622 h1.27
  text ".Layer_Name" at -137.369,-89.452 h2.03
Bottom Overlay:
  drawing of 133 lines, arcs and shapes, not listed
  text ".Layer_Name" at -137.496,-101.263 h2.03
Top Solder:
  circle w2.54: c0,0 r4.239
  text ".Layer_Name" at -137.369,-91.865 h2.03
Bottom Solder:
  circle w2.54: c0,0 r4.239
  text ".Layer_Name" at -137.496,-98.85 h2.03
Mechanical 1:
  text ".Layer_Name" at -137.369,-104.565 h2.03
Mechanical 2:
  lines w0.102: 44.577,-86.001 44.577,-86.995 44.577,-92.837 45.847,-92.837 45.847,-85.725 49.657,-85.725 53.467,-85.725 53.467,-92.837 54.737,-92.837 54.737,-86.995 54.737,-86.001 ; 49.657,-92.837 46.228,-92.837 46.228,-86.106 49.657,-86.106 ; 49.657,-92.837 49.657,-86.106 ; 49.657,-92.837 49.657,-86.106 ; 49.657,-92.837 53.086,-92.837 53.086,-86.106 49.657,-86.106 ; 43.307,-85.725 49.657,-83.185 56.007,-85.725 55.626,-86.36 49.657,-83.947 43.688,-86.36 43.307,-85.725 ; 46.609,-92.456 49.276,-92.456 49.276,-89.662 46.609,-89.662 46.609,-92.456 ; 46.609,-89.281 46.609,-86.487 49.276,-86.487 49.276,-89.281 46.609,-89.281 ; 50.038,-92.456 52.705,-92.456 52.705,-89.662 50.038,-89.662 50.038,-92.456 ; 50.038,-89.281 50.038,-86.487 52.705,-86.487 52.705,-89.281 50.038,-89.281
  lines w0.203: -142.449,-81.705 106.471,-81.705 ; -117.049,-109.645 -117.049,-81.705 ; -43.389,-109.645 -43.389,-81.705 ; 37.891,-109.645 37.891,-96.945 ; 37.891,-81.705 37.891,-96.945 ; 106.471,-96.945 37.891,-96.945 ; -144.989,-112.185 -144.989,91.015 109.011,91.015 109.011,-112.185 -144.989,-112.185 ; -142.449,-109.645 -142.449,88.475 106.471,88.475 106.471,-109.645 -142.449,-109.645
  text "Layer Stack" at -137.369,-84.245 h2.54
  text ".Layer_Name" at -137.369,-86.785 h2.03
  text "Board Material : FR4  62 Mils (1.6mm) end thickness" at -114.509,-86.785 h2.03
  text "Number of components" at -40.849,-86.785 h2.03
  text ".Component_Count" at -15.449,-86.785 h2.03
  text "SiliconValleyGarage.com" at 58.928,-86.868 h5.08
  text "Double sided" at -114.509,-89.325 h2.03
  text "Number of holes" at -40.849,-89.325 h2.03
  text ".Hole_Count" at -15.449,-89.325 h2.03
  text "HASL finish - Lead free not required" at -114.509,-91.865 h2.03
  text "Number of pads" at -40.849,-91.865 h2.03
  text ".Pad_Count" at -15.449,-91.865 h2.03
  text "Top and bottom Liquid soldermask Blue" at -114.509,-94.405 h2.03
  text "Number of vias" at -40.849,-94.405 h2.03
  text ".Via_Count" at -15.449,-94.405 h2.03
  text "Top and bottom Liquid silkscreen White" at -114.509,-96.945 h2.03
  text "Printed" at -40.849,-99.485 h2.03
  text ".Print_Date" at -15.449,-99.485 h2.03
  text "Pulse Generator MK-II" at 40.259,-101.219 h3.81
  text ".Print_Time" at -15.449,-102.025 h2.03
  text "Scale" at -40.849,-104.565 h2.03
  text ".Print_Scale" at -15.449,-104.565 h2.03
  text "Use Keepout layer for board contour milling" at -114.554,-107.569 h2.03
  text "Drawn By : Vincent Himpe" at 40.499,-107.989 h2.03

## Text inside footprints (layer, text, board x,y; h text height)
K1: Top Overlay "-" at -11.913,7.747 h1.02; Top Overlay "+" at -34.392,7.798 h1.02; Top Overlay "CR2032" at -26.391,10.871 h1.02; Top Overlay "BU2032-HD-G" at -28.473,8.865 h1.02; Top Overlay "MEM PROT. DEV." at -29.362,6.756 h1.02